# Altium PCB PCB.pcbdoc
Units mm, origin at the board's own origin, x right, y up, seen from the top; angles counter-clockwise.
Board outline 116.3 x 89.72 mm, 2 copper layers (Top Layer, Bottom Layer); 36 components, 84 nets, 233 pads, 142 vias.
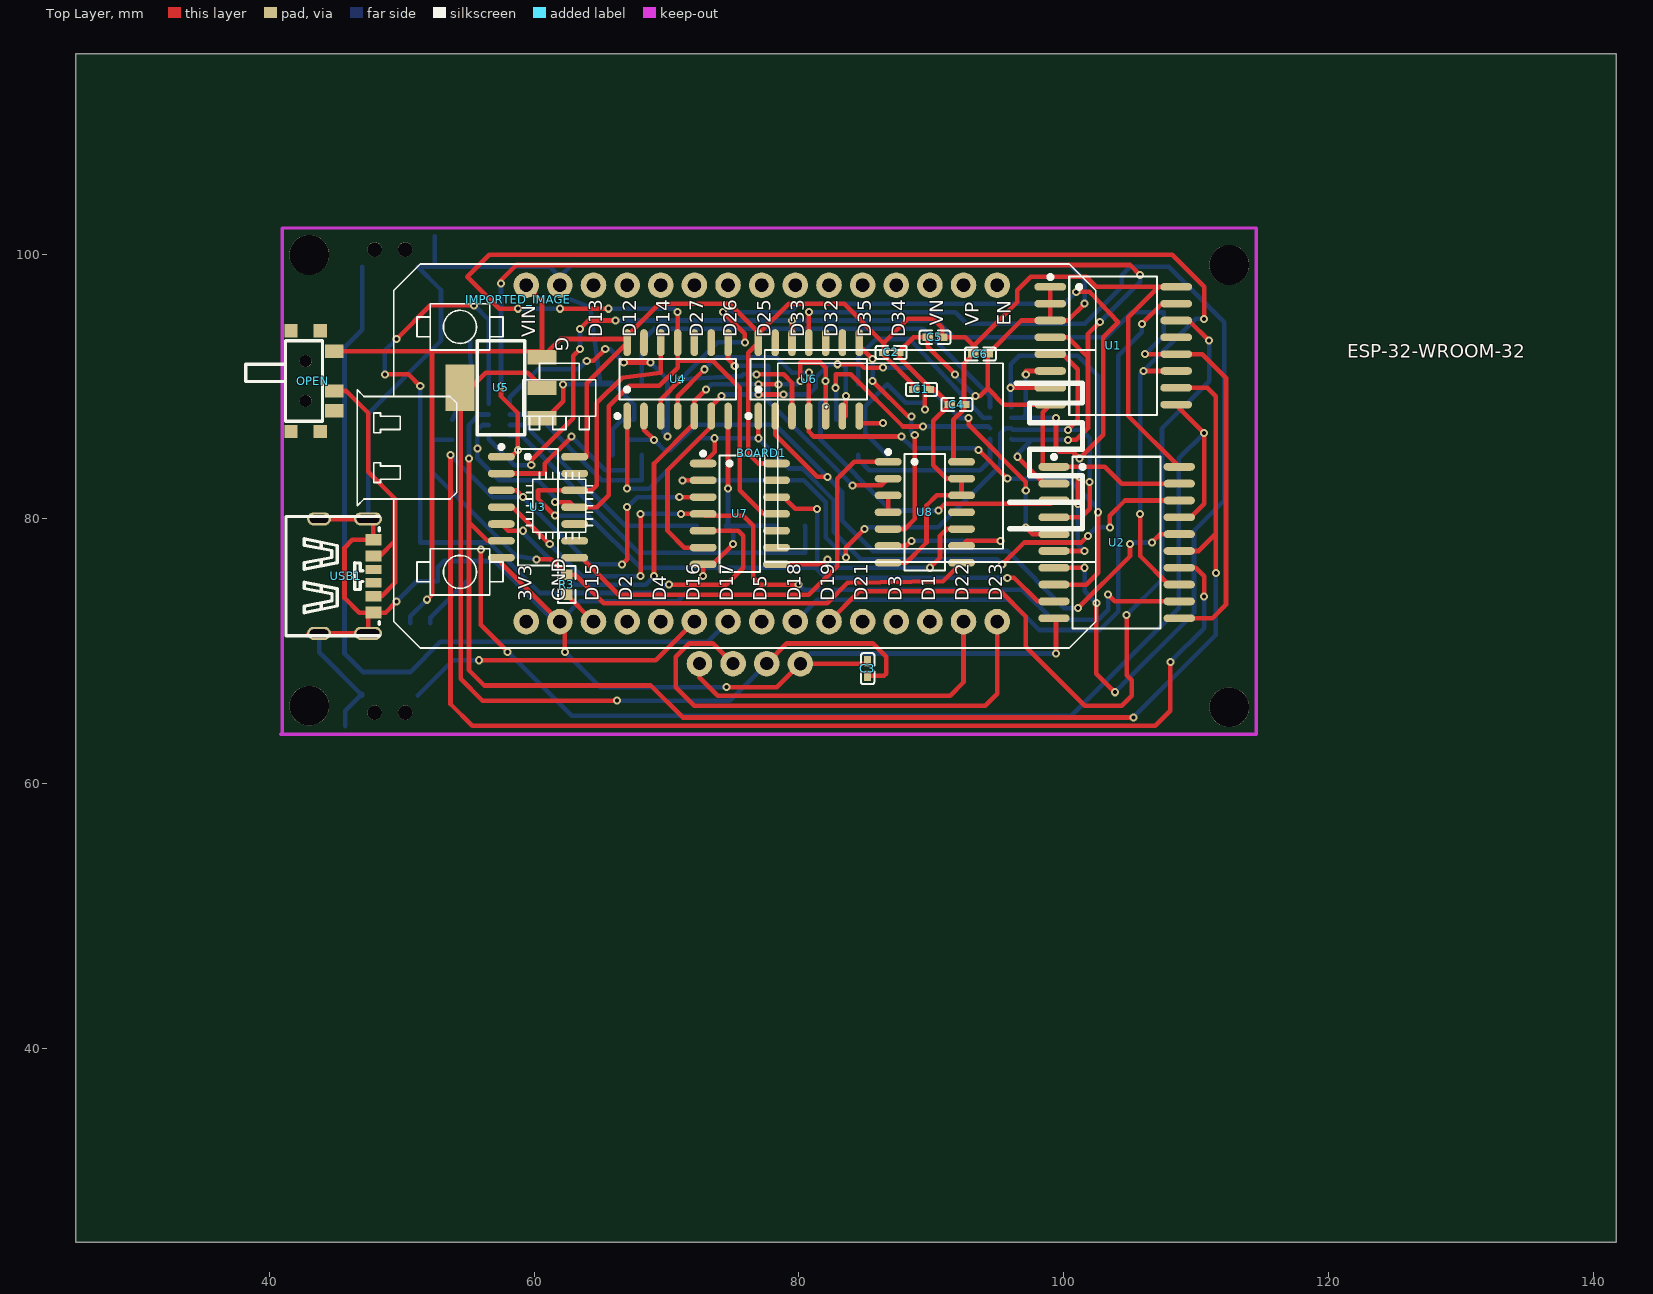
[diagram p0: Top Layer view]
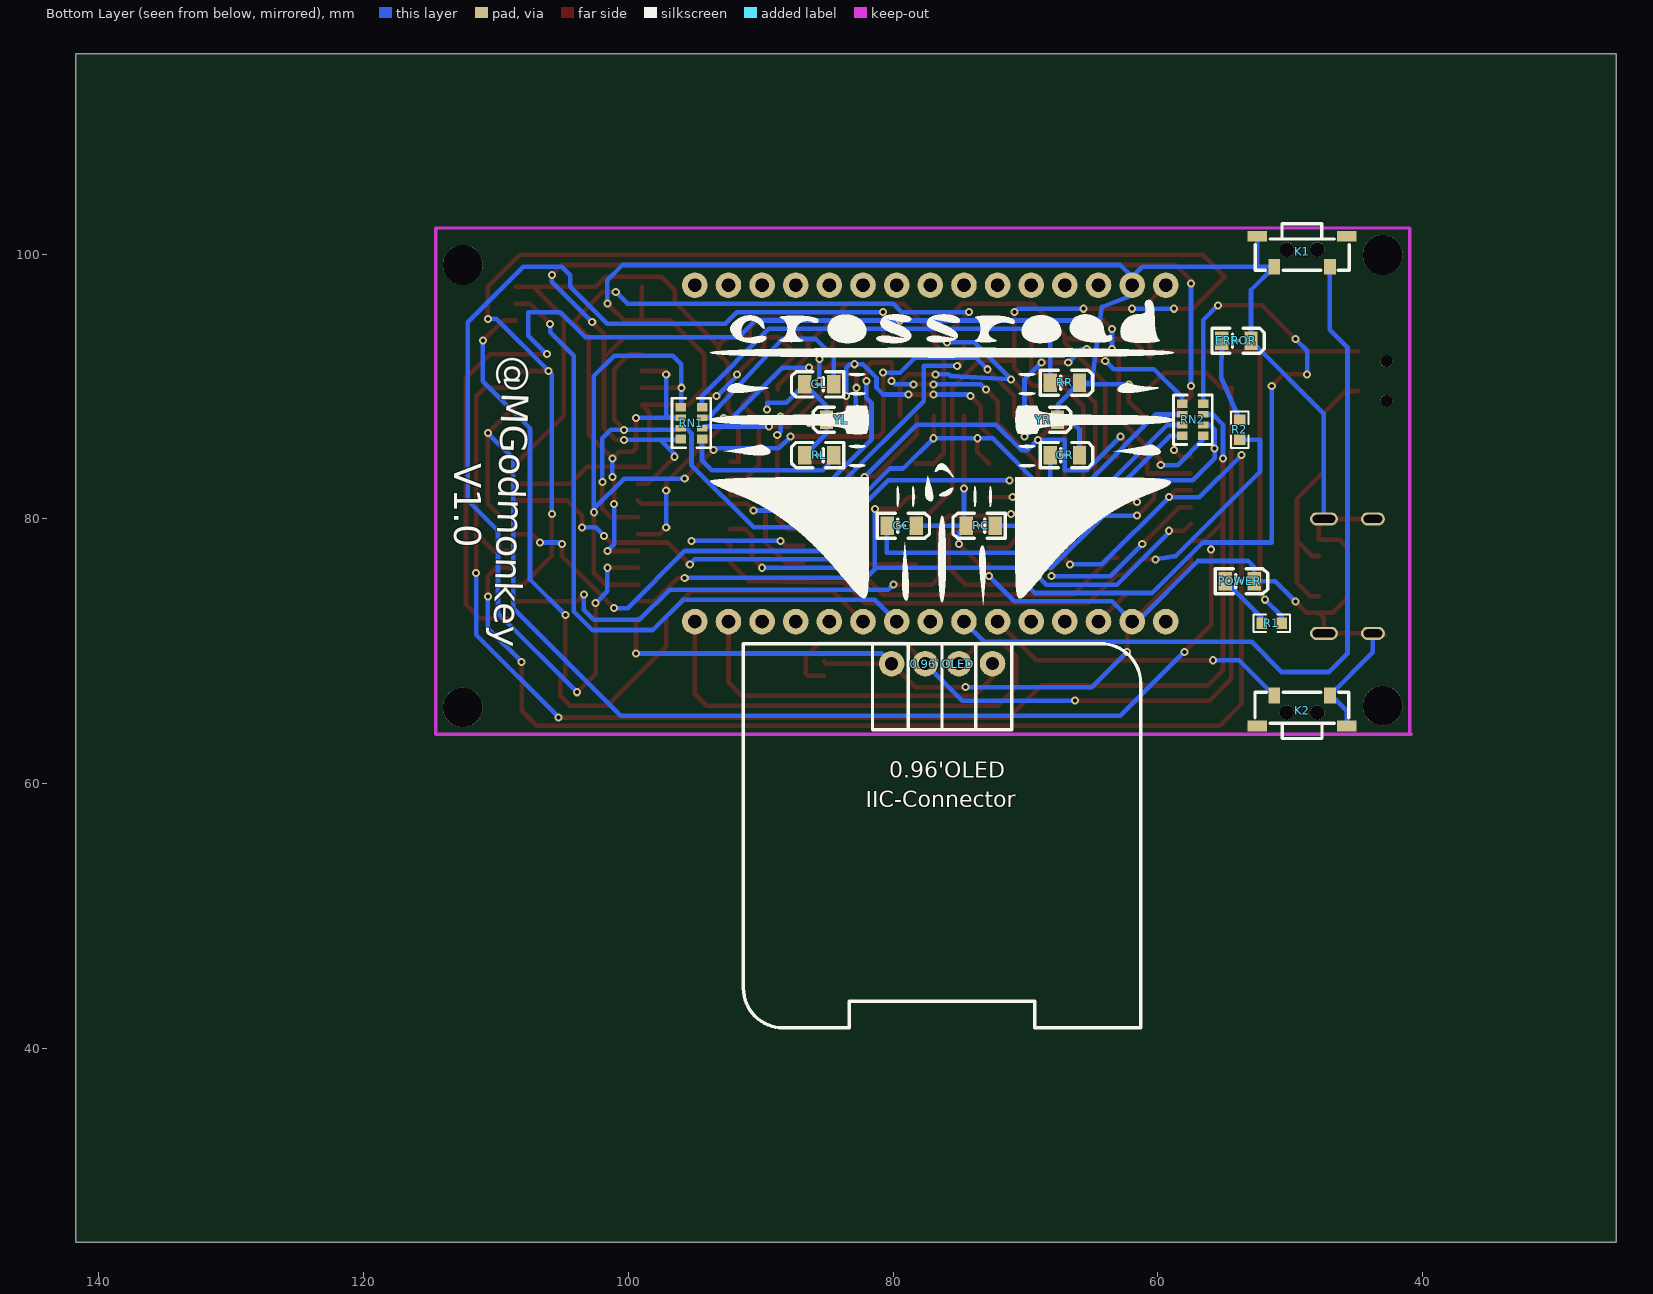
[diagram p1: Bottom Layer view, seen from below]

## Layer stack, top to bottom
Top Layer: signal copper (thickness not stored)
Dielectric: dielectric 0.32, FR-4, Dk 4.8
Bottom Layer: signal copper (thickness not stored)

## Board outline
141.701,25.4 25.4,25.4 25.4,115.118 141.701,115.118

## Components (designator, comment, footprint, x,y, rotation, side; value= is the part's Value field where it differs from the comment)
0.96`OLED "0.96OLED_4P" 0.96OLED_4P 76.296,69.076 r0 bottom
BOARD1 "ESP32DEVKITV1" ESP32-DEVKITV1 59.405,72.251 r0 top
C1 "100nF" C0402 89.25,89.777 r180 top
C2 "100nF" C0402 86.964,92.571 r0 top
C3 "100nF" C0402 85.186,68.695 r90 top
C4 "100nF" C0402 91.917,88.634 r0 top
C5 "100nF" C0402 90.266,93.714 r0 top
C6 "100nF" C0402 93.695,92.444 r0 top
ERROR "17-21SURC/S530-A2/TR8" LED0805-RD 54.071,93.46 r180 bottom
GC "17-21SURC/S530-A2/TR8" LED0805-RD 79.344,79.49 r180 bottom
GL "17-21SURC/S530-A2/TR8" LED0805-RD 85.567,90.158 r0 bottom
GR "17-21SURC/S530-A2/TR8" LED0805-RD 67.025,84.824 r180 bottom
IMPORTED_IMAGE "IMPORTED_IMAGE" IMPORTED_IMAGE 58.796,96.536 r0 top
K1 "KH-3635-CAJ" SW-SMD_KH-3635-CAJ 49.118,100.191 r180 bottom
K2 "KH-3635-CAJ" SW-SMD_KH-3635-CAJ 49.118,65.52 r0 bottom
OPEN "SK-3296S-01-L1" SW-SMD_3P-P1.50_L2.7-W6.6 43.276,90.412 r270 top
POWER "17-21SYGC/S530-E3/TR8" LED0805-RD 53.817,75.299 r180 bottom
R1 "510" R0603#1 51.404,72.124 r0 bottom
R2 "510" R0603#1 53.817,86.729 r90 bottom
R3 "1k" R0603#2 62.453,75.045 r90 top
RC "17-21SURC/S530-A2/TR8" LED0805-RD 73.375,79.49 r0 bottom
RL "17-21SURC/S530-A2/TR8" LED0805-RD 85.567,84.824 r0 bottom
RN1 "470" RES-ARRAY-SMD_0603-8P-L3.2-W1.6-BL 95.219,87.237 r270 bottom
RN2 "470" RES-ARRAY-SMD_0603-8P-L3.2-W1.6-BL 57.373,87.491 r90 bottom
RR "17-21SURC/S530-A2/TR8" LED0805-RD 67.025,90.285 r180 bottom
U1 "PCF8574T/3,518" SOIC-16_L10.3-W7.5-P1.27-LS10.3-BL 103.728,93.079 r270 top
U2 "74HC240D,653" SOIC-20_L13.0-W7.6-P1.27-LS10.6-BL 103.982,78.22 r270 top
U3 "74HC30D,653" SOIC-14_L8.7-W3.9-P1.27-LS6.0-BL 60.294,80.887 r270 top
U4 "74HC30D,653" SOIC-14_L8.7-W3.9-P1.27-LS6.0-BL 70.835,90.539 r0 top
U5 "AMS1117-3.3_C347222" SOT-223_L6.7-W3.5-P2.30-BR 57.5,89.904 r0 top
U6 "74HC30D,653" SOIC-14_L8.7-W3.9-P1.27-LS6.0-BL 80.741,90.539 r0 top
U7 "74HC30D,653" SOIC-14_L8.7-W3.9-P1.27-LS6.0-BL 75.534,80.379 r270 top
U8 "74HC08D,653" SOIC-14_L8.7-W3.9-P1.27-LS6.0-BL 89.504,80.506 r270 top
USB1 "KH-TYPE-C-6P" TYPE-C-SMD_TYPE-C-31-M-16 45.816,75.68 r270 top
YL "17-21SURC/S530-A2/TR8" LED0805-RD 83.916,87.491 r0 bottom
YR "17-21SURC/S530-A2/TR8" LED0805-RD 68.676,87.491 r180 bottom

## Footprints (in the part's own frame and the unit in brackets; to place one, negate y for a bottom-side part, rotate by r counter-clockwise, add the part's x,y. Pads: shape width x height; smd on the part's side, far side on the other; paste and mask are expansions set on the pad)
0.96OLED_4P [mm]
  round 1.93 hole 1: 1(3.81,0.001) 2(1.27,-0.002) 3(-1.27,-0.002) 4(-3.81,-0.002)
  silkscreen extent -15,-1.5 15,27.5
C0402 [mm]
  rect 0.79x0.54 smd: 1(-0.545,0) 2(0.545,0)
  silkscreen extent -1.17,-0.5 1.17,0.5
ESP32-DEVKITV1 [mil]
  round 76 hole 39.36: 3V3(0,0) D1(1200,0) D2(300,0) D3(1100,0) D4(400,0) D5(700,0) D12(300,1000) D13(200,1000) D14(400,1000) D15(200,0) D16(500,0) D17(600,0) D18(800,0) D19(900,0) D21(1000,0) D22(1300,0) D23(1400,0) D25(700,1000) D26(600,1000) D27(500,1000) D32(900,1000) D33(800,1000) D34(1100,1000) D35(1000,1000) EN(1400,1000) GND(100,1000) GND@1(100,0) VIN(0,1000) VN(1200,1000) VP(1300,1000)
  silkscreen extent -502,-79 1693,1063
IMPORTED_IMAGE [mm]
LED0805-RD [mm]
  rect 1x1.4 smd: 1(1.1,0) 2(-1.1,0)
  silkscreen extent -1.85,-0.95 2.1,0.95
R0603#1 [mm]
  rect 0.806x0.864 smd: 1(0.753,0) 2(-0.753,0)
  silkscreen extent -1.39,-0.66 1.39,0.66
R0603#2 [mm]
  rect 0.806x0.864 smd: 1(-0.753,0) 2(0.753,0)
  silkscreen extent -1.39,-0.66 1.39,0.66
RES-ARRAY-SMD_0603-8P-L3.2-W1.6-BL [mm]
  rect 0.65x0.8 smd: 1(1.2,0.8) 4(-1.2,0.8) 5(-1.2,-0.8) 8(1.2,-0.8)
  rect 0.5x0.8 smd: 2(0.4,0.8) 3(-0.4,0.8) 6(-0.4,-0.8) 7(0.4,-0.8)
  silkscreen extent -1.87,-1.47 1.87,1.45
SOIC-14_L8.7-W3.9-P1.27-LS6.0-BL [mm]
  oval 0.574x2.038 smd: 1(-3.81,-2.769) 2(-2.54,-2.769) 3(-1.27,-2.769) 4(0,-2.769) 5(1.27,-2.769) 6(2.54,-2.769) 7(3.81,-2.769) 8(3.81,2.769) 9(2.54,2.769) 10(1.27,2.769) 11(0,2.769) 12(-1.27,2.769) 13(-2.54,2.769) 14(-3.81,2.769)
  silkscreen extent -4.7,-2.92 4.4,1.52
SOIC-16_L10.3-W7.5-P1.27-LS10.3-BL [mm]
  oval 0.574x2.401 smd: 1(-4.445,-4.75) 2(-3.175,-4.75) 3(-1.905,-4.75) 4(-0.635,-4.75) 5(0.635,-4.75) 6(1.905,-4.75) 7(3.175,-4.75) 8(4.445,-4.75) 9(4.445,4.75) 10(3.175,4.75) 11(1.905,4.75) 12(0.635,4.75) 13(-0.635,4.75) 14(-1.905,4.75) 15(-3.175,4.75) 16(-4.445,4.75)
  silkscreen extent -5.33,-4.9 5.23,3.32
SOIC-20_L13.0-W7.6-P1.27-LS10.6-BL [mm]
  oval 0.595x2.36 smd: 1(-5.715,-4.73) 2(-4.445,-4.73) 3(-3.175,-4.73) 4(-1.905,-4.73) 5(-0.635,-4.73) 6(0.635,-4.73) 7(1.905,-4.73) 8(3.175,-4.73) 9(4.445,-4.73) 10(5.715,-4.73) 11(5.715,4.73) 12(4.445,4.73) 13(3.175,4.73) 14(1.905,4.73) 15(0.635,4.73) 16(-0.635,4.73) 17(-1.905,4.73) 18(-3.175,4.73) 19(-4.445,4.73) 20(-5.715,4.73)
  silkscreen extent -6.61,-4.88 6.48,3.32
SOT-223_L6.7-W3.5-P2.30-BR [mm]
  rect 2.2x1.1 smd: 1(3.099,-2.3) 2(3.099,0) 3(3.099,2.3)
  rect 2.2x3.5 smd: 4(-3.099,0)
  silkscreen extent -1.8,-3.55 1.8,3.55
SW-SMD_3P-P1.50_L2.7-W6.6 [mm]
  rect 1x1 smd: 0(-3.8,-1.625) 0(-3.8,0.575) 0(3.8,-1.625) 0(3.8,0.575)
  rect 1x1.4 smd: 1(-2.25,1.625) 2(0.75,1.625) 3(2.25,1.625)
  round 0.9 hole 0.9 unplated: ""(-1.5,-0.525) ""(1.5,-0.525)
  silkscreen extent -3.05,-5.05 3.05,0.75
SW-SMD_KH-3635-CAJ [mm]
  rect 0.9x1.2 smd: 1(2.1,-1.15) 2(-2.1,-1.15)
  rect 1.45x0.8 smd: 3(3.375,1.15) 4(-3.375,1.15)
  round 1.1 hole 1.1 unplated: ""(-1.15,0.15) ""(1.15,0.15)
  silkscreen extent -3.53,-1.4 3.55,2.1
TYPE-C-SMD_TYPE-C-31-M-16 [mm]
  oval 1x2.1 hole 0.6 slot 1.7 at 90 deg: 1(-4.32,1.65) 2(4.32,1.65)
  oval 1x1.8 hole 0.6 slot 1.4 at 90 deg: 3(-4.32,-2.05) 4(4.32,-2.05)
  rect 0.7x1.2 smd: A5(-0.5,2.05) B5(0.5,2.05)
  rect 0.8x1.2 smd: A9(1.52,2.05) B9(-1.52,2.05)
  rect 0.9x1.2 smd: A12(2.75,2.05) B12(-2.75,2.05)
  silkscreen extent -4.5,-4.55 4.5,2.49

## Free pads (board coordinates)
  round 3 hole 3 unplated: ""(43.022,65.901) ""(43.022,99.937) ""(112.491,65.774) ""(112.491,99.175)

## Via types
v1: diameter 0.61, hole 0.305, Top Layer to Bottom Layer, 142 vias

## Nets (pads, with @x,y where several pads share a name; then routed paths per layer and width w, separated by ;. In a path a pad name is that pad's centre, name@x,y a point inside that pad or via, vN(x,y) a via of type N, cw(c..) or ccw(c..) an arc to the next point about the centre after c; other vN are vias at no path point)
+3.3V: 0.96`OLED.2 C3.1 U5.2 U5.4 | length 66.9
  Top Layer w0.35: U5.2 60.599,89.98 59.532,91.047 56.357,91.047 55.214,89.904 U5.4 54.452,89.853 54.452,67.933 56.103,66.282 v1(66.263,66.282) ; 0.96`OLED.2 79.089,70.6 85.567,70.6 86.583,69.584 86.583,68.314 86.419,68.15 C3.1
  Bottom Layer w0.35: v1(66.263,66.282) 74.771,66.282 0.96`OLED.2
+5V: BOARD1.VIN C1.2 C2.1 C4.2 C5.2 C6.1 OPEN.1 R1.2 U1.16 U2.20 U3.14 U4.14 U5.3 U6.14 U7.14 U8.14 | length 157.6
  Top Layer w0.35: OPEN.1 60.599,92.662 U5.3@60.599,92.203 ; v1(51.912,73.902) 52.293,74.283 52.293,92.203 52.293,92.662 ; BOARD1.VIN 60.599,96.457 U5.3 ; U3.14 63.977,84.697 63.977,90.26 U4.14 ; U7.14 76.931,84.189 76.169,84.951 76.169,92.546 U6.14 ; C1.2 88.704,90.069 86.418,92.355 C2.1 ; U8.14 91.663,84.316 91.663,87.491 92.463,88.291 C4.2@92.463,88.634 ; C4.2 92.462,91.756 C6.1 93.149,93.117 ; U2.20 104.871,87.775 104.871,95.238 107.157,97.524 U1.16 102.458,97.524 101.696,98.286 97.505,98.286 96.489,97.27 96.489,96.381 93.225,93.117 93.149,93.117 ; U5.3@60.599,92.203 61.983,93.587 67.025,93.587 U4.14 ; U4.14 67.025,93.841 69.438,96.254 74.772,96.254 76.931,94.095 U6.14 ; U6.14 76.931,93.968 79.217,96.254 83.408,96.254 86.418,93.244 C2.1 ; C2.1 86.418,93.295 88.234,95.111 90.139,95.111 90.812,94.438 90.812,93.714 92.552,93.714 93.149,93.117
  Bottom Layer w0.35: R1.2 50.651,72.641 v1(51.912,73.902)
A: RN1.8 U1.4 U2.2 U3.1 | length 92
  Top Layer w0.35: v1(57.5,90.031) 57.5,89.269 58.77,87.999 v1(58.77,85.205) 58.262,84.697 U3.1 ; v1(57.5,97.778) 57.5,98.032 58.643,99.175 104.998,99.175 v1(105.76,98.413) ; v1(96.489,84.697) 98.521,82.665 U2.2 ; U1.4 100.299,93.714 101.823,92.19 ; v1(100.299,85.967) 100.934,85.967 101.823,86.856 101.823,92.19 ; v1(102.712,94.857) 101.823,93.968 101.823,92.19
  Bottom Layer w0.35: v1(57.5,90.031) v1(57.5,97.778) ; RN1.8 96.09,85.967 97.759,85.967 v1(100.299,85.967) ; v1(96.489,84.697) 96.489,84.881 97.575,85.967 ; v1(102.712,94.857) 105.76,97.905 v1(105.76,98.413)
A`: U2.18 U4.1 U6.1 U7.1 | length 60.6
  Top Layer w0.35: v1(67.025,82.284) U4.1 ; U7.1 73.629,85.053 v1(73.629,86.094) ; v1(76.931,86.094) U6.1 ; v1(95.346,76.569) 96.997,78.22 101.315,78.22 v1(101.823,78.728) ; v1(103.474,79.363) 103.474,80.252 104.617,81.395 U2.18
  Bottom Layer w0.35: v1(67.025,82.284) 68.676,82.284 72.486,86.094 v1(73.629,86.094) v1(76.931,86.094) 79.217,83.808 80.233,83.808 82.646,81.395 82.646,78.982 84.678,76.95 94.965,76.95 v1(95.346,76.569) ; v1(101.823,78.728) 102.458,79.363 v1(103.474,79.363)
B: RN1.7 U1.5 U2.4 U7.2 | length 58.2
  Top Layer w0.35: v1(71.216,82.919) U7.2 ; v1(83.535,77.077) 83.535,77.839 v1(84.932,79.236) ; U1.5 99.918,92.444 101.061,91.301 101.061,87.491 v1(100.299,86.729) ; U2.4 101.315,80.125 101.95,80.76 v1(101.95,82.792)
  Bottom Layer w0.35: v1(71.216,82.919) 80.36,82.919 82.011,81.268 82.011,78.601 v1(83.535,77.077) ; v1(84.932,79.236) 85.059,79.363 90.52,79.363 95.219,84.062 95.219,86.475 95.581,86.837 RN1.7 ; RN1.7 96.127,86.729 97.886,86.729 v1(100.299,86.729) 101.315,86.729 101.95,86.094 v1(101.95,82.792)
B`: U2.16 U3.2 U4.2 U6.2 | length 75.9
  Top Layer w0.35: U3.2 60.802,83.427 60.802,84.189 v1(62.834,86.221) ; U4.2 68.295,86.729 v1(69.057,85.967) ; U6.2 78.201,86.348 81.376,83.173 v1(82.138,83.173) ; v1(101.061,73.267) 104.998,77.204 v1(104.998,78.093) ; v1(106.649,78.22) 107.284,78.855 U2.16
  Bottom Layer w0.35: v1(62.834,86.221) 65.374,83.681 67.025,83.681 67.025,85.967 v1(69.057,85.967) 69.819,85.205 70.327,85.205 72.232,87.11 78.201,87.11 v1(82.138,83.173) 83.281,82.03 83.281,79.871 85.567,77.585 95.727,77.585 100.045,73.267 v1(101.061,73.267) ; v1(104.998,78.093) 105.125,78.22 v1(106.649,78.22)
BOARD1_3V3: BOARD1.3V3
BOARD1_D1: BOARD1.D1
BOARD1_D2: BOARD1.D2
BOARD1_D3: BOARD1.D3
BOARD1_D4: BOARD1.D4
BOARD1_D5: BOARD1.D5
BOARD1_D12: BOARD1.D12
BOARD1_D13: BOARD1.D13
BOARD1_D14: BOARD1.D14
BOARD1_D15: BOARD1.D15 R3.1 | length 2.9
  Top Layer w0.35: R3.1 62.453,74.283 BOARD1.D15
BOARD1_D21: BOARD1.D21
BOARD1_D25: BOARD1.D25
BOARD1_D26: BOARD1.D26
BOARD1_D27: BOARD1.D27
BOARD1_D32: BOARD1.D32
BOARD1_D33: BOARD1.D33
BOARD1_D34: BOARD1.D34
BOARD1_D35: BOARD1.D35
BOARD1_EN: BOARD1.EN
BOARD1_VN: BOARD1.VN
BOARD1_VP: BOARD1.VP
C: RN1.6 U1.6 U2.6 U4.3 U6.3 | length 89.4
  Top Layer w0.35: U4.3 69.565,89.015 v1(71.089,90.539) ; v1(74.264,95.619) 75.915,93.968 v1(75.915,93.333) ; v1(76.804,90.92) 78.836,90.92 79.471,90.285 U6.3 ; v1(97.124,90.92) 97.124,91.174 U1.6 ; U2.6 v1(101.569,77.585) ; v1(99.41,87.637) 99.41,85.332 99.664,85.078 100.68,85.078 v1(101.188,84.57) 102.966,86.348 102.966,93.714 104.109,94.857 102.077,97.016 101.95,97.143 v1(100.934,97.143) ; v1(101.061,81.141) 101.061,83.046 v1(101.188,83.173)
  Bottom Layer w0.35: v1(74.264,95.619) 79.344,95.619 79.979,96.254 100.045,96.254 v1(100.934,97.143) ; v1(75.915,93.333) 73.883,93.333 v1(71.089,90.539) 75.661,90.793 75.788,90.92 v1(76.804,90.92) ; RN1.6 96.889,87.637 ; v1(97.124,90.92) 97.124,87.872 96.889,87.637 ; v1(99.41,87.637) 96.889,87.637 ; v1(101.061,81.141) 101.061,78.093 v1(101.569,77.585) ; v1(101.188,83.173) v1(101.188,84.57)
C`: U2.14 U3.3 U7.3 | length 116.4
  Top Layer w0.35: v1(53.69,84.824) 53.69,66.028 55.341,64.377 106.903,64.377 108.046,65.52 v1(108.046,69.203) ; U3.3 58.643,82.157 v1(59.151,81.649) ; v1(66.644,76.569) 67.025,76.95 v1(67.025,80.887) ; v1(70.962,81.649) U7.3 ; U2.14 109.951,76.315 110.586,75.68 v1(110.586,74.156)
  Bottom Layer w0.35: v1(53.69,84.824) 56.865,81.649 v1(59.151,81.649) 64.231,76.569 v1(66.644,76.569) ; v1(67.025,80.887) 67.787,81.649 v1(70.962,81.649) ; v1(108.046,69.203) 110.586,71.743 v1(110.586,74.156)
D: RN1.5 U1.7 U2.8 U4.4 U6.4 | length 74.5
  Top Layer w0.35: U4.4 70.835,89.269 v1(72.867,91.301) ; v1(80.741,91.047) U6.4 80.741,86.602 81.122,86.221 v1(87.726,86.221) ; v1@93.441,85.205 v1(93.568,85.205) v1(95.727,83.046) ; v1(95.981,89.904) U1.7 ; U2.8 101.696,75.045 102.585,75.934 v1(102.585,80.506)
  Bottom Layer w0.35: v1(72.867,91.301) 73.756,92.19 78.328,92.19 79.471,91.047 v1(80.741,91.047) ; v1(87.726,86.221) 88.615,85.332 93.441,85.332 v1(93.568,85.205) ; v1(95.727,83.046) 100.299,83.046 102.585,80.76 v1(102.585,80.506) 102.585,90.793 101.061,92.317 96.616,92.317 95.981,91.682 v1(95.981,89.904) 95.981,88.475 RN1.5
D`: U2.12 U3.4 U7.4 | length 65.3
  Top Layer w0.35: U3.4 58.389,80.887 v1(61.183,78.093) ; v1(68.041,75.68) v1(68.041,80.379) ; v1(71.089,80.379) U7.4 72.892,80.252 75.788,80.252 76.55,79.49 76.55,75.553 77.058,75.045 v1(79.979,75.045) ; v1(103.347,74.283) 103.855,73.775 U2.12
  Bottom Layer w0.35: v1(61.183,78.093) 63.596,75.68 v1(68.041,75.68) ; v1(68.041,80.379) v1(71.089,80.379) ; v1(79.979,75.045) 80.36,74.664 96.87,74.664 99.156,72.378 102.585,72.378 103.347,73.14 v1(103.347,74.283)
DC: OPEN.2 USB1.A9 USB1.B9 | length 21.5
  Top Layer w0.35: OPEN.2 45.803,89.663 47.467,87.999 47.467,83.554 49.499,81.522 49.499,78.347 48.351,77.199 USB1.B9@47.866,77.199 ; USB1.A9 48.488,74.161 49.499,75.172 49.499,77.966 49.499,78.764
E: RN2.8 U1.9 U2.17 U7.5 | length 154.8
  Top Layer w0.35: v1(48.737,90.92) 50.515,90.92 v1(51.404,90.031) ; v1(49.626,93.587) 52.166,96.127 v1(55.468,96.127) ; v1(55.976,77.691) 55.976,71.997 v1(58.008,69.965) ; v1(70.2,75.045) 74.518,75.045 75.788,76.315 75.788,78.728 75.407,79.109 U7.5 ; U1.9 108.478,88.583 v1(110.586,86.475) 110.586,81.141 109.57,80.125 U2.17
  Bottom Layer w0.35: v1(48.737,90.92) 48.737,92.698 v1(49.626,93.587) ; v1(51.404,90.031) 51.404,78.22 56.611,78.22 60.421,74.41 69.311,74.41 69.946,75.045 v1(70.2,75.045) ; v1(55.468,96.127) 56.573,95.022 RN2.8 ; v1(55.976,77.691) 55.976,78.22 ; v1(58.008,69.965) 62.834,65.139 100.553,65.139 108.681,73.267 108.681,84.57 v1(110.586,86.475)
E`: U2.3 U3.5 U4.5 U6.5 | length 68.7
  Top Layer w0.35: U3.5 58.033,79.109 v1(59.151,79.109) ; v1(69.057,75.68) 69.057,84.189 72.105,87.237 U4.5 ; U4.5 72.105,88.888 v1(72.994,89.777) ; v1(76.931,90.158) v1(78.455,90.158) ; v1(80.106,90.412) 80.106,91.809 81.63,91.809 82.011,91.428 v1(82.011,90.412) U6.5 ; v1(90.52,80.633) 91.028,81.141 98.998,81.141 U2.3
  Bottom Layer w0.35: v1(59.151,79.109) 59.151,78.982 63.088,75.045 68.422,75.045 v1(69.057,75.68) ; v1(72.994,89.777) 73.375,90.158 v1(76.931,90.158) ; v1(78.455,90.158) 79.852,90.158 v1(80.106,90.412) ; v1(82.011,90.412) 82.011,89.142 81.63,88.761 81.63,85.967 86.964,80.633 v1(90.52,80.633)
ERROR_2: ERROR.2 R2.1 | length 6.3
  Bottom Layer w0.35: R2.1 55.214,90.666 ERROR.2
F: RN2.7 U1.10 U2.15 U3.6 | length 108.6
  Top Layer w0.35: 55.087,79.932 55.087,68.568 56.23,67.425 68.803,67.425 71.216,65.012 v1(105.252,65.012) ; v1(55.087,84.57) 55.087,79.744 56.484,78.347 U3.6 ; U1.10 110.84,89.904 111.475,89.269 111.475,78.888 110.172,77.585 U2.15 ; v1(111.475,75.934) 111.475,78.888
  Bottom Layer w0.35: v1(55.087,84.57) 55.087,87.11 55.868,87.891 RN2.7 ; v1(105.252,65.012) 111.475,71.235 v1(111.475,75.934)
F`: U2.5 U4.6 U6.6 U7.6 | length 53.9
  Top Layer w0.35: U7.6 71.343,77.839 70.073,79.109 70.073,83.681 73.375,86.983 U4.6 ; U4.6 73.375,88.507 v1(74.137,89.269) ; v1(76.931,89.396) v1(78.836,89.396) ; v1(82.9,91.682) 84.678,91.682 84.932,91.428 v1(86.329,91.428) ; U6.6 83.535,87.77 v1(83.535,89.269) ; v1(92.806,87.618) 92.806,87.11 97.124,82.792 v1(97.124,82.157) ; v1(97.124,79.363) 97.632,78.855 U2.5
  Bottom Layer w0.35: v1(74.137,89.269) 74.264,89.396 v1(76.931,89.396) ; v1(78.836,89.396) 80.741,89.396 81.249,89.904 81.249,90.666 82.265,91.682 v1(82.9,91.682) 83.281,91.682 83.535,91.428 v1(83.535,89.269) ; v1(86.329,91.428) 88.361,91.428 92.171,87.618 v1(92.806,87.618) ; v1(97.124,79.363) v1(97.124,82.157)
G: RN2.6 U1.11 U2.13 U3.11 U4.11 U7.11 | length 154
  Top Layer w0.35: v1(58.77,95.873) 57.373,95.873 54.96,98.286 56.611,99.937 108.173,99.937 110.586,97.524 v1(110.586,95.111) ; v1(61.564,81.268) 62.682,81.268 U3.11 64.739,80.887 65.628,81.776 65.628,88.507 67.177,90.056 69.463,90.056 70.835,91.428 U4.11 ; v1(61.945,95.873) v1(65.628,95.873) ; v1(70.835,95.619) U4.11 ; U7.11 77.312,80.379 75.534,82.157 75.534,89.904 73.502,91.936 70.835,91.936 U4.11 ; v1(105.76,80.379) 105.76,77.204 107.919,75.045 U2.13 ; v1(106.014,91.174) U1.11
  Bottom Layer w0.35: RN2.6 56.084,87.091 55.722,86.729 v1(55.722,85.332) 55.722,84.57 57.373,82.919 60.294,82.919 61.564,81.649 v1(61.564,81.268) ; v1(58.77,95.873) v1(61.945,95.873) ; v1(65.628,95.873) 70.581,95.873 v1(70.835,95.619) ; v1(105.76,80.379) 105.76,90.92 v1(106.014,91.174) 109.951,95.111 v1(110.586,95.111)
G`: U2.7 U6.11 | length 82.1
  Top Layer w0.35: U6.11 v1(80.741,95.619) ; U2.7 v1(101.569,76.315) ; v1(102.458,73.648) 102.458,68.314 v1(103.855,66.917)
  Bottom Layer w0.35: v1(80.741,95.619) 91.79,95.619 92.679,94.73 101.569,94.73 104.363,97.524 104.363,98.413 104.998,99.048 107.919,99.048 112.11,94.857 112.11,81.395 109.824,79.109 109.824,72.886 v1(103.855,66.917) ; v1(101.569,76.315) 101.569,74.537 v1(102.458,73.648)
GC_2: GC.2 RN2.4 | length 28
  Bottom Layer w0.35: RN2.4@58.173,86.29 59.082,86.29 67.914,77.458 80.487,77.458 80.487,79.447 GC.2
GL_2: GL.2 RN1.3 | length 15.2
  Bottom Layer w0.35: GL.2 84.467,92.233 85.821,93.587 88.361,93.587 93.929,87.638 RN1.3
GND: 0.96`OLED.1 BOARD1.GND BOARD1.GND@1 C1.1 C2.2 C3.2 C4.1 C5.1 C6.2 ERROR.1 GC.1 GL.1 GR.1 K1.2 K1.4 K2.2 K2.4 POWER.1 RC.1 RL.1 RR.1 U1.1 U1.2 U1.3 U1.8 U2.1 U2.10 U2.19 U3.7 U4.7 U5.1 U6.7 U7.7 U8.7 U8.12 U8.13 USB1.1 USB1.2 USB1.3 USB1.4 USB1.A12 USB1.B12 YL.1 YR.1 | length 322.3
  Top Layer w0.35: 42.877,71.233 43.004,71.36 USB1.2 47.466,72.53 USB1.A12 ; USB1.3 USB1.1 47.866,79.6 USB1.B12 46.28,78.43 45.689,77.839 45.689,74.029 46.788,72.93 USB1.A12 ; v1(49.626,73.775) 48.781,72.93 USB1.A12 ; U3.7 57.525,76.671 61.945,72.251 62.326,71.87 v1(62.326,69.965) ; U5.1 60.915,87.604 62.199,88.888 v1(62.199,90.158) ; v1(72.74,75.68) 72.765,75.705 U7.7 73.502,76.569 v1(75.026,78.093) ; v1(74.518,67.298) 78.329,67.298 0.96`OLED.1 85.021,69.075 C3.2 ; v1(74.645,82.284) U4.7 ; U6.7 84.551,87.237 v1(86.329,87.237) ; U8.7 88.107,76.696 89.631,78.22 89.631,81.014 90.393,81.776 U8.12 U8.13 91.155,83.046 90.139,84.062 90.139,87.401 C4.1 90.229,89.777 C1.1 89.504,89.486 v1(89.504,88.253) ; C2.2 88.652,93.714 C5.1 89.721,92.989 v1(91.79,90.92) ; C2.2@87.51,92.571 87.51,92.279 89.796,89.993 C1.1@89.796,89.777 ; v1(93.314,89.269) 93.644,89.269 94.241,89.866 ; C6.2 96.78,94.984 U1.3 ; C6.2@94.241,92.444 94.241,89.866 ; U1.1 U1.2 U1.3 ; U2.10 99.41,72.347 v1(99.41,69.838) ; U2.1 103.093,83.935 104.363,82.665 U2.19 ; U2.1 98.394,83.935 98.394,88.05 U1.8 95.473,88.634 94.241,89.866 ; v1(101.569,96.254) 100.299,94.984 U1.3
  Bottom Layer w0.35: USB1.4 43.766,69.922 K2.2 ; K2.4@45.743,64.37 45.743,65.522 K2.2@47.018,66.797 ; USB1.1 47.466,87.955 ERROR.1 52.971,97.288 K1.2 ; v1(49.626,73.775) 51.15,75.299 POWER.1 ; K1.2 52.494,99.048 ; K1.4@52.493,101.341 52.493,99.048 61.183,99.048 BOARD1.GND@61.945,98.286 ; POWER.1 52.717,76.358 53.182,76.823 56.992,76.823 61.564,72.251 61.945,72.251 63.469,73.775 70.835,73.775 v1(72.74,75.68) ; v1(62.199,90.158) 65.798,90.158 RR.1 67.576,88.634 YR.1 ; v1(62.326,69.965) 64.993,67.298 v1(74.518,67.298) ; GR.1 65.925,86.772 66.644,87.491 YR.1 ; RR.1 64.993,90.285 64.231,96 61.945,96.889 BOARD1.GND ; v1(74.645,82.284) 74.645,79.49 RC.1 ; v1(75.026,78.093) 75.026,78.939 RC.1 ; GC.1 RC.1 ; 0.96`OLED.1 80.869,69.838 v1(99.41,69.838) ; v1(86.329,87.237) 85.016,87.237 YL.1 ; RL.1 85.016,86.475 YL.1 ; v1(89.504,88.253) 89.504,88.761 88.064,88.761 GL.1 85.016,88.507 YL.1 ; v1(91.79,90.92) 91.79,90.793 v1(93.314,89.269) ; v1(101.569,96.254) 101.569,98.032 100.426,99.175 62.834,99.175 BOARD1.GND@61.945,98.286 ; BOARD1.GND BOARD1.GND@61.945,98.286 ; BOARD1.GND BOARD1.GND@61.945,98.286
GR_2: GR.2 RN2.2 | length 13.9
  Bottom Layer w0.35: RN2.2 60.148,87.891 65.12,82.919 68.125,82.919 GR.2
H: RN2.5 U1.12 U2.11 U6.12 | length 95.1
  Top Layer w0.35: v1(59.786,84.062) 59.786,84.443 62.961,87.618 62.961,92.317 v1(63.469,92.825) ; v1(63.469,94.349) 64.104,94.984 v1(66.136,94.984) ; U6.12 v1(79.471,94.984) ; v1(106.141,92.444) U1.12 110.459,92.444 112.237,90.666 112.237,73.521 111.221,72.505 U2.11
  Bottom Layer w0.35: RN2.5 56.573,86.005 58.516,84.062 v1(59.786,84.062) ; v1(63.469,92.825) v1(63.469,94.349) ; v1(66.136,94.984) v1(79.471,94.984) 90.393,94.984 91.663,93.714 103.22,93.714 105.125,95.619 107.538,95.619 107.538,93.841 v1(106.141,92.444)
H`: U2.9 U3.12 U4.12 U7.12 | length 69.7
  Top Layer w0.35: v1(61.564,80.252) 60.294,81.522 60.294,82.157 U3.12 64.358,82.157 64.739,82.538 64.739,88.761 66.644,90.666 69.565,91.047 69.565,91.682 U4.12 ; U7.12 78.836,81.649 79.725,80.76 v1(81.376,80.76) ; v1(95.727,75.553) 96.235,75.553 98.013,73.775 U2.9
  Bottom Layer w0.35: v1(61.564,80.252) 64.104,80.252 68.041,76.315 81.376,76.315 v1(81.376,80.76) ; 81.376,76.569 81.376,76.188 82.011,75.553 v1(95.727,75.553)
K1: BOARD1.D17 K1.1 | length 60.9
  Bottom Layer w0.35: K1.1 47.017,94.28 45.689,92.952 45.689,69.838 47.086,68.441 50.642,68.441 52.928,70.727 73.121,70.727 BOARD1.D17
K1_3: K1.3
K2: BOARD1.D16 K2.1 | length 23.2
  Top Layer w0.35: v1(55.849,69.33) 69.184,69.33 BOARD1.D16
  Bottom Layer w0.35: K2.1 53.878,69.33 v1(55.849,69.33)
K2_3: K2.3
LED1_2: POWER.2 R1.1 | length 4.3
  Bottom Layer w0.35: R1.1 52.157,72.539 POWER.2
OLED_SCL: 0.96`OLED.3 BOARD1.D23 | length 38.3
  Top Layer w0.35: 0.96`OLED.3 73.503,70.6 71.724,70.6 70.708,69.584 70.708,67.298 72.105,65.901 94.076,65.901 94.965,66.79 BOARD1.D23
OLED_SDA: 0.96`OLED.4 BOARD1.D22 | length 26.5
  Top Layer w0.35: 0.96`OLED.4 72.486,68.06 73.883,66.663 91.409,66.663 92.425,67.679 BOARD1.D22
OPEN_0: OPEN.0
OPEN_3: OPEN.3
RC_2: RC.2 RN2.3 | length 17.3
  Bottom Layer w0.35: RN2.3 59.297,87.091 66.898,79.49 RC.2
RL_2: RL.2 RN1.1 | length 12.5
  Bottom Layer w0.35: RL.2 84.467,84.527 85.313,83.681 93.695,83.681 94.419,84.405 RN1.1
RR_2: RN1.4 RR.2 | length 32.8
  Bottom Layer w0.35: RR.2 68.125,93.417 69.057,94.349 89.377,94.349 94.419,89.307 RN1.4@94.419,88.436
SCL: BOARD1.D19 U1.14 | length 61.7
  Top Layer w0.35: BOARD1.D19 84.551,74.537 95.219,74.537 97.124,72.632 97.124,70.346 101.569,65.901 104.363,65.901 105.125,66.663 105.125,67.806 104.744,68.187 v1(104.744,72.759) ; U1.14 109.443,94.984 v1(110.967,93.46)
  Bottom Layer w0.35: v1(104.744,72.759) 107.411,75.426 107.411,86.856 110.967,90.412 v1(110.967,93.46)
SDA: BOARD1.D18 U1.15 | length 52.3
  Top Layer w0.35: v1(105.887,94.73) 107.411,96.254 U1.15
  Bottom Layer w0.35: BOARD1.D18 81.376,73.902 95.854,73.902 98.14,71.616 102.712,71.616 104.109,73.013 104.109,92.317 105.887,94.095 v1(105.887,94.73)
U1_13: U1.13
U3_9: U3.9
U3_10: U3.10
U3_13: U3.13
U4_9: U4.9
U4_10: U4.10
U4_13: U4.13
U6_9: U6.9
U6_10: U6.10
U6_13: U6.13
U7_9: U7.9
U7_10: U7.10
U7_13: U7.13
U8_3: U8.3 U8.4 | length 1.3
  Top Layer w0.35: U8.4 U8.3
U8_6: U8.6 U8.9 | length 11.7
  Top Layer w0.35: U8.6 88.107,77.966 v1(88.488,78.347) ; U8.9 92.654,78.347 v1(95.219,78.347)
  Bottom Layer w0.35: v1(88.488,78.347) v1(95.219,78.347)
U8_11: U8.11
USB1_A5: USB1.A5
USB1_B5: USB1.B5
Y: R2.2 R3.2 U8.8 | length 49.1
  Top Layer w0.35: v1(60.167,76.95) 61.301,76.95 R3.2 ; R3.2 63.096,75.799 65.247,73.648 82.138,73.648 83.662,75.172 83.789,75.172 90.876,75.299 U8.8
  Bottom Layer w0.35: R2.2@53.817,85.967 52.293,85.967 52.293,83.554 58.643,77.204 v1(60.167,76.95)
Y1: U3.8 U8.1 | length 32.9
  Top Layer w0.35: U3.8 63.596,77.077 66.39,74.283 80.741,74.283 82.9,76.442 82.9,83.046 84.17,84.316 U8.1
Y2: U4.8 U8.2 | length 19.1
  Top Layer w0.35: U4.8 74.645,92.063 v1(75.153,91.555) ; v1(84.043,82.538) 86.227,82.538 U8.2
  Bottom Layer w0.35: v1(75.153,91.555) 77.693,91.555 77.693,88.888 v1(84.043,82.538)
Y3: U6.8 U8.5 | length 17.5
  Top Layer w0.35: U6.8 84.551,93.079 v1(85.567,92.063) ; v1(85.567,90.412) 88.234,87.745 v1(88.488,87.745) ; U8.5 87.98,79.236 88.742,79.998 v1(88.742,86.348)
  Bottom Layer w0.35: v1(85.567,90.412) v1(85.567,92.063) ; v1(88.488,87.745) 88.488,86.602 v1(88.742,86.348)
Y4: U7.8 U8.10 | length 16.6
  Top Layer w0.35: U7.8 81.757,76.569 v1(82.138,76.95) ; v1(89.885,76.315) 90.647,77.077 90.647,78.728 91.155,79.236 U8.10
  Bottom Layer w0.35: v1(82.138,76.95) 82.773,76.315 v1(89.885,76.315)
YL_2: RN1.2 YL.2 | length 16.8
  Top Layer w0.35: v1(82.773,89.904) 82.773,90.92 83.916,90.92 87.853,86.983 v1(89.377,86.983)
  Bottom Layer w0.35: v1(82.773,89.904) 82.816,89.861 YL.2 ; v1(89.377,86.983) 94.273,86.983 RN1.2
YR_2: RN2.1 YR.2 | length 20.6
  Top Layer w0.35: v1(63.977,91.936) 64.485,91.936 v1(65.374,92.825) ; v1(66.771,91.809) v1(68.803,91.809)
  Bottom Layer w0.35: RN2.1 58.173,89.18 60.294,91.301 63.342,91.301 v1(63.977,91.936) ; v1(65.374,92.825) 65.755,92.825 v1(66.771,91.809) ; v1(68.803,91.809) 70.073,90.539 v1(70.073,86.221) 69.776,86.518 YR.2
pads on no net: K1. K2. OPEN.

## Silkscreen, mask and mechanical layers (free items; w line width, h text height)
Bottom Overlay:
  text "@MGodmonkey" at 109.442,92.352 h2.03 r92
  text "V1.0" at 113.126,84.189 h2.03 r90

## Text inside footprints (layer, text, board x,y; h text height)
0.96`OLED: Bottom Overlay "IIC-Connector" at 82.052,58.229 h1.2; Bottom Overlay "0.96'OLED" at 80.294,60.476 h1.2
BOARD1: Top Overlay "3V3" at 59.805,73.791 h1.02 r90; Top Overlay "GND" at 62.345,73.791 h1.02 r90; Top Overlay "D15" at 64.885,73.791 h1.02 r90; Top Overlay "D2" at 67.425,73.791 h1.02 r90; Top Overlay "D4" at 69.965,73.791 h1.02 r90; Top Overlay "D16" at 72.505,73.791 h1.02 r90; Top Overlay "D17" at 75.045,73.791 h1.02 r90; Top Overlay "D5" at 77.585,73.791 h1.02 r90; Top Overlay "D18" at 80.125,73.791 h1.02 r90; Top Overlay "D19" at 82.665,73.791 h1.02 r90; Top Overlay "D21" at 85.205,73.791 h1.02 r90; Top Overlay "D3" at 87.745,73.791 h1.02 r90; Top Overlay "D1" at 90.285,73.791 h1.02 r90; Top Overlay "D22" at 92.825,73.791 h1.02 r90; Top Overlay "D23" at 95.365,73.791 h1.02 r90; Top Overlay "VIN" at 60.075,93.721 h1.02 r90; Top Overlay "G" at 61.599,93.721 h1.02 r270; Top Overlay "D13" at 65.155,93.721 h1.02 r90; Top Overlay "D12" at 67.695,93.721 h1.02 r90; Top Overlay "D14" at 70.235,93.721 h1.02 r90; Top Overlay "D27" at 72.775,93.721 h1.02 r90; Top Overlay "D26" at 75.315,93.721 h1.02 r90; Top Overlay "D25" at 77.855,93.721 h1.02 r90; Top Overlay "D33" at 80.395,93.721 h1.02 r90; Top Overlay "D32" at 82.935,93.721 h1.02 r90; Top Overlay "D35" at 85.475,93.721 h1.02 r90; Top Overlay "D34" at 88.015,93.721 h1.02 r90; Top Overlay "VN" at 90.901,94.603 h1.02 r90; Top Overlay "VP" at 93.568,94.603 h1.02 r90; Top Overlay "EN" at 95.981,94.603 h1.02 r90; Document "`" at 88.027,86.444 h1.93 r198; Document "ESP32-DEVKITV1" at 85.765,67.711 h1.27; Top Overlay "ESP-32-WROOM-32" at 121.381,92.19 h1.02